# EAGLE board ambe_v1 (EAGLE 6.2)
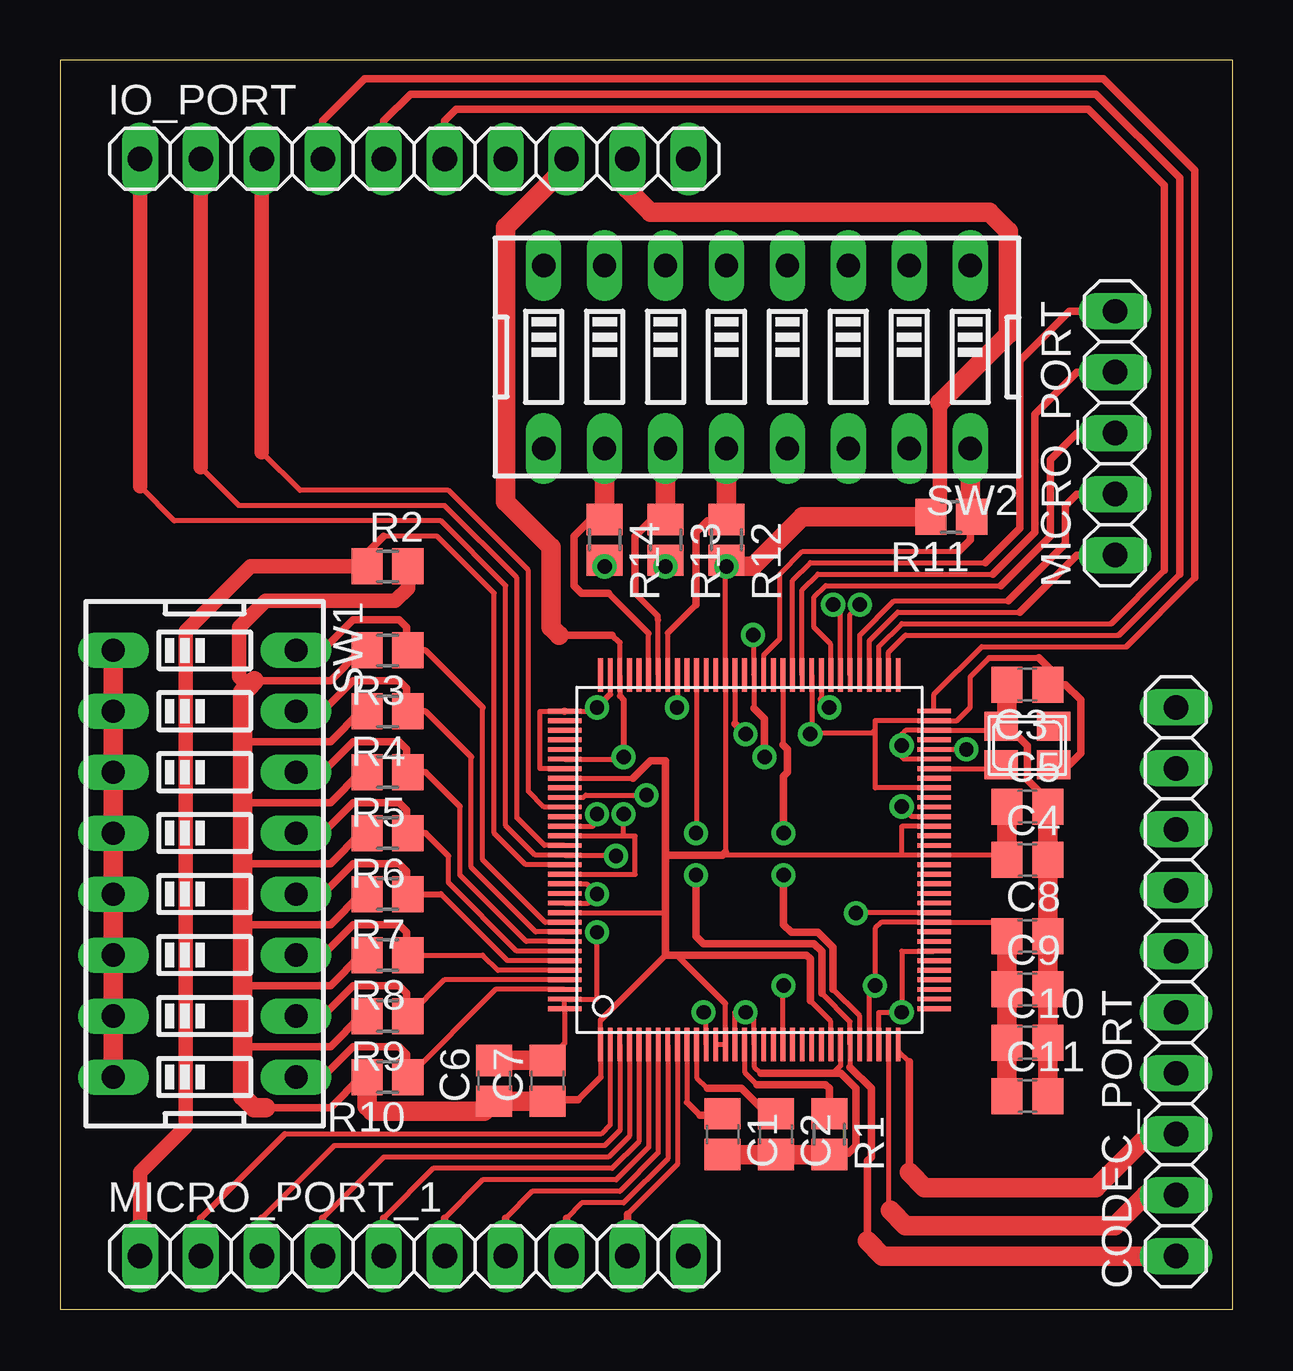
[diagram p0: board, top side]
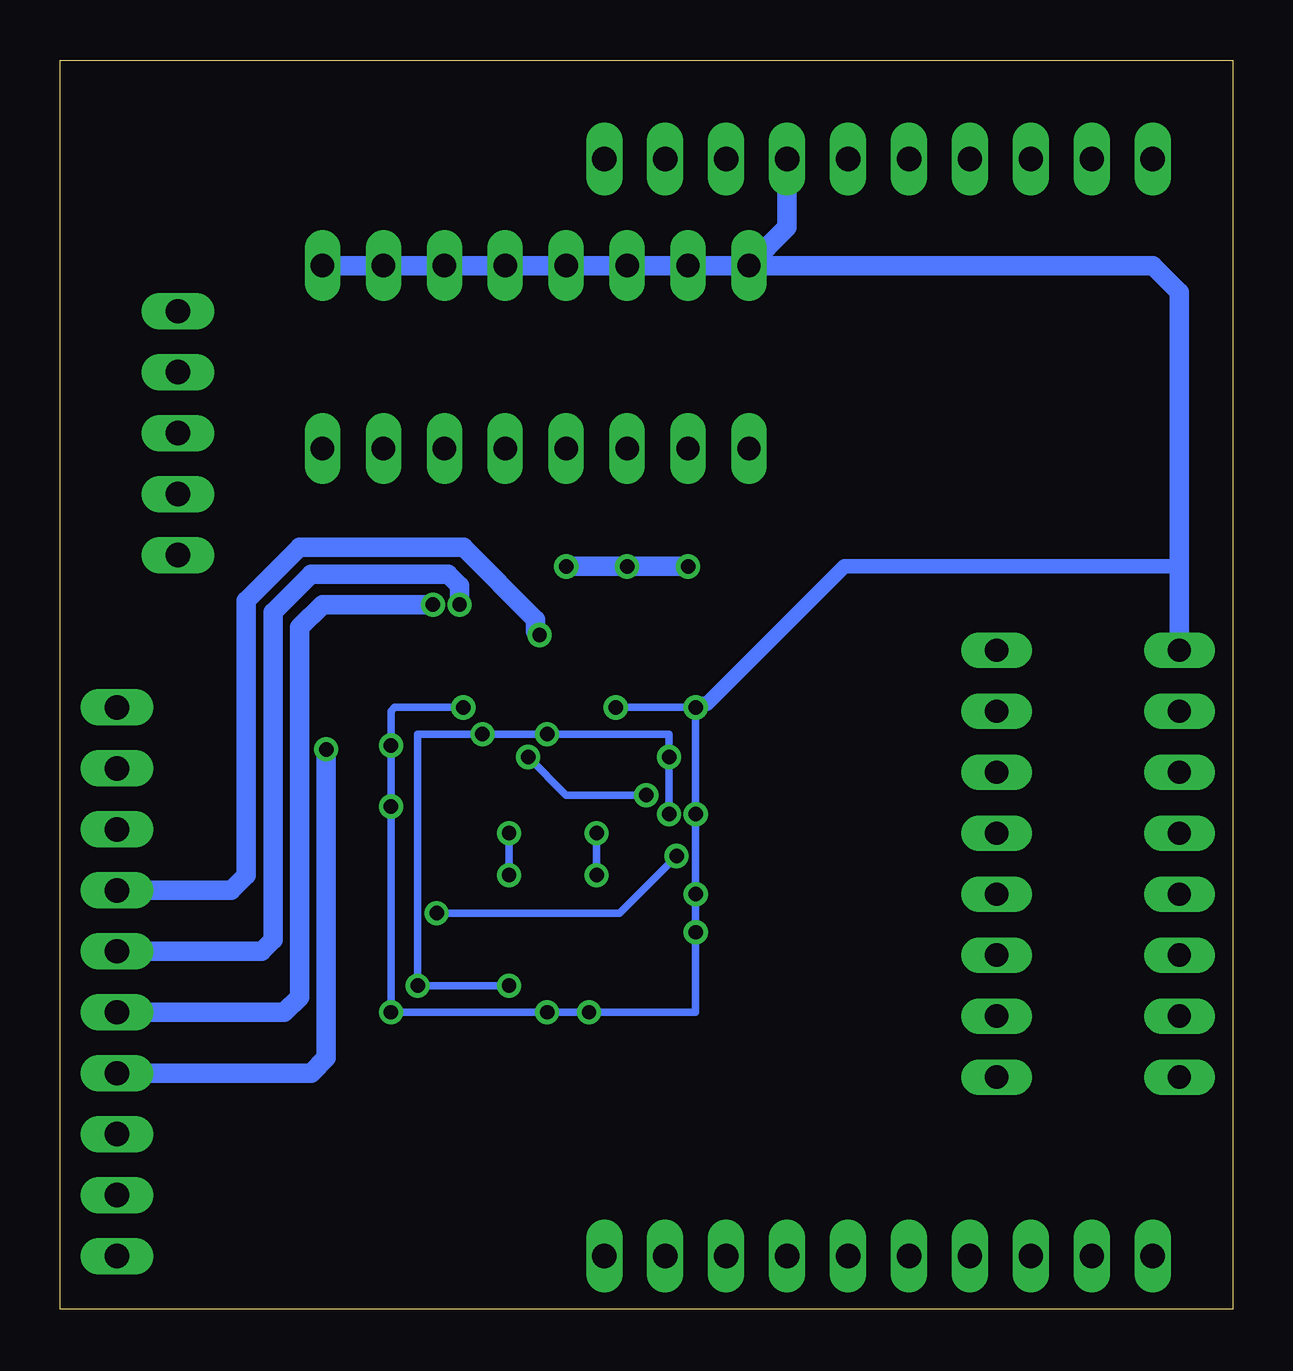
[diagram p1: board, bottom side, seen from below]

Size 48.88 x 52.06 mm. Coordinates in mm from the lower left corner, seen from the top.
Outline: 0,0 48.88,0 48.88,52.06 0,52.06 0,0
Copper layers (1*16): Top 0.035mm / dielectric 1.5mm / Bottom 0.035mm
Design rules: minimum track width 10mil, minimum drill 24mil, track to track 11mil, track to pad 11mil, pad to pad 11mil, via to via 11mil, smd to smd 11mil, copper to edge 40mil, drill to drill 8mil, minimum pad ring 10mil, minimum via ring 8mil, stop-mask expansion 4mil, vias tented up to drill 0mil, thermal gap 10mil

## Footprints (pad centres in the part's own frame; a part is rotated, then mirrored left to right if it is on the bottom)
C0805 = smd 1.3 x 1.5: 1 -0.85,0; 2 0.85,0
1X10 = drill 1.016 long: 1 -11.43,0; 2 -8.89,0; 3 -6.35,0; 4 -3.81,0; 5 -1.27,0; 6 1.27,0; 7 3.81,0; 8 6.35,0; 9 8.89,0; 10 11.43,0
LQFP-128 = smd 0.2 x 1.4: 1 -6.2,-7.7; 2 -5.8,-7.7; 3 -5.4,-7.7; 4 -5,-7.7; 5 -4.6,-7.7; 6 -4.2,-7.7; 7 -3.8,-7.7; 8 -3.4,-7.7; 9 -3,-7.7; 10 -2.6,-7.7; 11 -2.2,-7.7; 12 -1.8,-7.7; 13 -1.4,-7.7; 14 -1,-7.7; 15 -0.6,-7.7; 16 -0.2,-7.7; 17 0.2,-7.7; 18 0.6,-7.7; 19 1,-7.7; 20 1.4,-7.7; 21 1.8,-7.7; 22 2.2,-7.7; 23 2.6,-7.7; 24 3,-7.7; 25 3.4,-7.7; 26 3.8,-7.7; 27 4.2,-7.7; 28 4.6,-7.7; 29 5,-7.7; 30 5.4,-7.7; 31 5.8,-7.7; 32 6.2,-7.7; 65 6.2,7.7; 66 5.8,7.7; 67 5.4,7.7; 68 5,7.7; 69 4.6,7.7; 70 4.2,7.7; 71 3.8,7.7; 72 3.4,7.7; 73 3,7.7; 74 2.6,7.7; 75 2.2,7.7; 76 1.8,7.7; 77 1.4,7.7; 78 1,7.7; 79 0.6,7.7; 80 0.2,7.7; 81 -0.2,7.7; 82 -0.6,7.7; 83 -1,7.7; 84 -1.4,7.7; 85 -1.8,7.7; 86 -2.2,7.7; 87 -2.6,7.7; 88 -3,7.7; 89 -3.4,7.7; 90 -3.8,7.7; 91 -4.2,7.7; 92 -4.6,7.7; 93 -5,7.7; 94 -5.4,7.7; 95 -5.8,7.7; 96 -6.2,7.7 | smd 1.4 x 0.2: 33 7.7,-6.2; 34 7.7,-5.8; 35 7.7,-5.4; 36 7.7,-5; 37 7.7,-4.6; 38 7.7,-4.2; 39 7.7,-3.8; 40 7.7,-3.4; 41 7.7,-3; 42 7.7,-2.6; 43 7.7,-2.2; 44 7.7,-1.8; 45 7.7,-1.4; 46 7.7,-1; 47 7.7,-0.6; 48 7.7,-0.2; 49 7.7,0.2; 50 7.7,0.6; 51 7.7,1; 52 7.7,1.4; 53 7.7,1.8; 54 7.7,2.2; 55 7.7,2.6; 56 7.7,3; 57 7.7,3.4; 58 7.7,3.8; 59 7.7,4.2; 60 7.7,4.6; 61 7.7,5; 62 7.7,5.4; 63 7.7,5.8; 64 7.7,6.2; 97 -7.7,6.2; 98 -7.7,5.8; 99 -7.7,5.4; 100 -7.7,5; 101 -7.7,4.6; 102 -7.7,4.2; 103 -7.7,3.8; 104 -7.7,3.4; 105 -7.7,3; 106 -7.7,2.6; 107 -7.7,2.2; 108 -7.7,1.8; 109 -7.7,1.4; 110 -7.7,1; 111 -7.7,0.6; 112 -7.7,0.2; 113 -7.7,-0.2; 114 -7.7,-0.6; 115 -7.7,-1; 116 -7.7,-1.4; 117 -7.7,-1.8; 118 -7.7,-2.2; 119 -7.7,-2.6; 120 -7.7,-3; 121 -7.7,-3.4; 122 -7.7,-3.8; 123 -7.7,-4.2; 124 -7.7,-4.6; 125 -7.7,-5; 126 -7.7,-5.4; 127 -7.7,-5.8; 128 -7.7,-6.2
1X05 = drill 1.016 long: 1 -5.08,0; 2 -2.54,0; 3 0,0; 4 2.54,0; 5 5.08,0
NX3225 = smd 1.4 x 1.2: 1 -1.1,-0.8; 2 1.1,-0.8; 3 1.1,0.8; 4 -1.1,0.8
R0805 = smd 1.3 x 1.5: 1 -0.85,0; 2 0.85,0
DIPSWITCH-08 = drill 0.97 long: 1 -8.89,-3.81; 2 -6.35,-3.81; 3 -3.81,-3.81; 4 -1.27,-3.81; 5 1.27,-3.81; 6 3.81,-3.81; 7 6.35,-3.81; 8 8.89,-3.81; 9 8.89,3.81; 10 6.35,3.81; 11 3.81,3.81; 12 1.27,3.81; 13 -1.27,3.81; 14 -3.81,3.81; 15 -6.35,3.81; 16 -8.89,3.81

## Placement (x,y rotation side)
C1  C10uF 16V  [C0805]  27.62,7.3 270 top
C2  C10uF 16V  [C0805]  29.84,7.3 270 top
C3  C1uF 10V  [C0805]  40.32,26.04 180 top
C4  C0.1uF 10V  [C0805]  40.32,18.73 0 top
C5  C0.1uF 10V  [C0805]  40.32,20.95 0 top
C6  C0.1uF 10V  [C0805]  18.1,9.53 90 top
C7  C0.1uF 10V  [C0805]  20.32,9.53 90 top
C8  C0.1uF 10V  [C0805]  40.32,15.56 0 top
C9  C0.1uF 10V  [C0805]  40.32,13.34 0 top
C10  C0.1uF 10V  [C0805]  40.32,11.11 0 top
C11  C0.1uF 10V  [C0805]  40.32,8.89 0 top
CODEC_PORT  [1X10]  46.51,13.65 90 top
IC3  AMBE-3000LQFP-128  [LQFP-128]  28.73,18.73 0 top
IO_PORT  [1X10]  14.76,47.94 0 top
MICRO_PORT  [1X05]  43.97,36.51 90 top
MICRO_PORT_1  [1X10]  14.76,2.22 0 top
Q1  [NX3225]  40.32,23.5 180 top
R1  R24.9K  [R0805]  32.07,7.3 270 top
R2  R10K  [R0805]  13.65,30.96 0 top
R3  R10K  [R0805]  13.65,27.46 180 top
R4  R10K  [R0805]  13.65,24.92 180 top
R5  R10K  [R0805]  13.65,22.38 180 top
R6  R10K  [R0805]  13.65,19.84 180 top
R7  R10K  [R0805]  13.65,17.3 180 top
R8  R10K  [R0805]  13.65,14.76 180 top
R9  R10K  [R0805]  13.65,12.22 180 top
R10  R10K  [R0805]  13.65,9.68 180 top
R11  R10K  [R0805]  37.15,33.02 180 top
R12  R10K  [R0805]  27.78,32.07 270 top
R13  R10K  [R0805]  25.24,32.07 270 top
R14  R10K  [R0805]  22.7,32.07 270 top
SW1  [DIPSWITCH-08]  6.03,18.57 270 top
SW2  [DIPSWITCH-08]  29.05,39.69 180 top

## Library data of the parts
C1-C11 R1-R14 = resistor
CODEC_PORT IO_PORT MICRO_PORT MICRO_PORT_1 = pinhead
IC3 = AMBE-3000
Q1 = adafruit
SW1 SW2 = SparkFun-Electromechanical

## Nets
1V8: C3.1 C8.1 C9.1 C10.1 C11.1 IC3.20 IC3.29 IC3.42 IC3.56 IC3.63 IC3.74 IC3.82 IC3.94 IC3.102 IC3.110 IC3.114 IO_PORT.8 Q1.4
3V3: C4.1 C5.1 C6.1 C7.1 IC3.1 IC3.13 IC3.14 IC3.25 IC3.49 IC3.52 IC3.83 IC3.104 IC3.118 IO_PORT.9 R2.2 R3.2 R4.2 R5.2 R6.2 R7.2 R8.2 R9.2 R10.2 R11.2 R12.2 R13.2 R14.2
ADCRESEXT: IC3.16 R1.1
CODEC_CLKN: CODEC_PORT.1 IC3.27 IC3.86
CODEC_FSN: CODEC_PORT.7 IC3.80 IC3.106
CODEC_RESETN: CODEC_PORT.4 IC3.60
CODEC_RX_DATA: CODEC_PORT.2 IC3.31
CODEC_TX_DATA: CODEC_PORT.3 IC3.32
CONFIG0: IC3.119 R3.1 SW1.16
CONFIG1: IC3.120 R4.1 SW1.15
CONFIG2: IC3.121 R5.1 SW1.14
CONFIG3: IC3.122 R6.1 SW1.13
CONFIG4: IC3.123 R7.1 SW1.12
CONFIG5: IC3.124 R8.1 SW1.11
CONFIG6: IC3.125 R9.1 SW1.10
CONFIG7: IC3.126 R10.1 SW1.9
CONFIG8: IC3.2 MICRO_PORT_1.2
CONFIG9: IC3.3 MICRO_PORT_1.3
CONFIG10: IC3.4 MICRO_PORT_1.4
CONFIG11: IC3.5 MICRO_PORT_1.5
CONFIG12: IC3.6 MICRO_PORT_1.6
CONFIG13: IC3.7 MICRO_PORT_1.7
CONFIG14: IC3.8 MICRO_PORT_1.8
CONFIG15: IC3.9 MICRO_PORT_1.9
DSP_RESET: IC3.113 MICRO_PORT_1.1 R2.1
GND: C1.2 C2.2 C3.2 C4.2 C5.2 C6.2 C7.2 C8.2 C9.2 C10.2 C11.2 IC3.12 IC3.15 IC3.17 IC3.26 IC3.30 IC3.39 IC3.53 IC3.59 IC3.62 IC3.73 IC3.88 IC3.95 IC3.97 IC3.103 IC3.109 IC3.115 IC3.117 IC3.127 IC3.128 IO_PORT.7 Q1.2 R1.2 SW1.1 SW1.2 SW1.3 SW1.4 SW1.5 SW1.6 SW1.7 SW1.8 SW2.1 SW2.2 SW2.3 SW2.4 SW2.5 SW2.6 SW2.7 SW2.8
HOST_CLK: CODEC_PORT.6 IC3.71
HOST_DATA: CODEC_PORT.5 IC3.70
RXRDY: IC3.75 MICRO_PORT.4
RXRQST: IC3.72 MICRO_PORT.3
SPISTE: IC3.28 IC3.77
STAT0: IC3.78
STAT1: IC3.65
STAT2/UART0_RTS: IC3.64 IO_PORT.4
STAT3: IC3.61
STAT4: IC3.55
STAT5: IC3.54
STAT6: IC3.45
STAT7: IC3.44
STAT/CONFIG0: IC3.101
STAT/CONFIG1: IC3.91 R14.1 SW2.10
STAT/CONFIG2: IC3.90 R13.1 SW2.11
STAT/CONFIG3: IC3.89 R12.1 SW2.12
STAT/CONFIG4: IC3.85
STAT/CONFIG5: IC3.84
STAT/CONFIG6: IC3.81
STAT/CONFIG7: IC3.79 R11.1 SW2.16
TXFRM: IC3.76 MICRO_PORT.5
TXRDY: IC3.69 MICRO_PORT.2
TXRQST: IC3.68 MICRO_PORT.1
UART0_CHAN_RX: IC3.43 IC3.112 IO_PORT.1
UART0_CHAN_TX: IC3.111 IO_PORT.2
UART0_CTS: IC3.107 IO_PORT.3
UART1_RX: IC3.67 IO_PORT.6
UART1_TX: IC3.66 IO_PORT.5
VREF_1V: C1.1 IC3.10
VREF_2V: C2.1 IC3.11
X1: IC3.58 Q1.3

## Tracks (layer width: path | path; a pad name or v marks a point on that pad's centre or on a via)
1V8  (via drill 0.6)
  Top 0.203: IC3.102 23.41,22.93 | IC3.110 23.5,19.73 | IC3.114 23.97,18.13 23.97,19.73 23.5,19.73 | 23.5,19.73 v23.5,20.64 | IC3.56 33.97,21.73 33.97,24.13 | 33.97,24.13 33.97,24.53 IC3.63 37.39,24.53 37.94,25.08 37.94,26.35 38.73,27.15 | 23.33,25.56 IC3.94 23.33,27.78 | IC3.74 31.33,24.03 33.87,24.03 33.97,24.13 | IC3.29 33.73,13.26 v33.97,13.49 33.97,15.88 34.23,16.13 IC3.42 38.9,16.13 | IC3.20 30.13,13.46 v30.16,13.49 | IC3.82 28.13,24.41
  Top 0.254: 23.33,25.56 23.5,25.4 v23.5,23.02 | 38.73,27.15 40.8,27.15 | 23.33,27.78 23.02,28.1
  Top 0.305: 23.41,22.93 v23.5,23.02 | 31.33,24.03 v31.27,23.97 | 28.13,24.41 v28.57,23.97 | 38.9,16.13 C8.1 | 40.8,27.15 41.27,26.67 41.27,26.14 C3.1 41.91,26.04 42.55,25.4 42.55,23.18 42.06,22.7 Q1.4 | 23.02,28.1 20.8,28.1
  Top 0.813: C8.1 C9.1 C10.1 C11.1 | IO_PORT.8 21.11,47.62 18.57,45.09 18.57,33.66 20.48,31.75 20.48,28.42 20.8,28.1
  Bottom 0.305: v23.5,20.64 v23.5,23.02 23.5,23.97 v28.57,23.97 v31.27,23.97 33.97,23.97 v33.97,13.49 v30.16,13.49
3V3  (via drill 0.6)
  Top 0.203: IC3.13 IC3.14 27.73,12.75 | 22.53,12.06 IC3.1 22.53,9.68 | IC3.104 23.88,22.13 | IC3.49 35.08,18.93 35.08,20.13 IC3.52 | IC3.49 27.62,18.93 | IC3.118 25.22,16.53 | 27.73,19.04 IC3.83 27.73,31.17 | IC3.25 32.13,12 31.27,12.86 | 39.27,18.93 IC3.49
  Top 0.254: 22.53,12.06 25.24,14.76 | 22.53,9.68 21.59,8.73 | 27.73,12.75 25.72,14.76
  Top 0.305: R3.2 12.54,27.46 11.27,26.19 8.57,26.19 8.1,26.19 | R4.2 12.54,24.92 11.27,23.65 7.62,23.65 | R5.2 12.54,22.38 11.27,21.11 7.78,21.11 7.62,20.95 | R6.2 12.54,19.84 11.27,18.57 7.62,18.57 | R7.2 12.54,17.3 11.27,16.03 7.62,16.03 | R8.2 12.54,14.76 11.27,13.49 7.78,13.49 7.62,13.34 | R9.2 12.54,12.22 11.27,10.95 7.62,10.95 | R10.2 12.54,9.68 11.27,8.41 8.57,8.41 | 21.59,8.73 20.38,8.73 C7.1 | 25.24,18.93 25.24,22.86 24.61,22.86 23.88,22.13 | 25.24,18.93 25.24,16.51 | 25.24,16.51 25.24,14.76 25.72,14.76 31.11,14.76 31.27,14.61 31.27,12.86 | 25.24,18.93 27.62,18.93 27.73,19.04 | 25.22,16.53 25.24,16.51 | 39.27,18.93 C4.1 | 27.73,31.17 R12.2
  Top 0.61: 36.67,37.78 36.67,33.39 R11.2 | v22.7,30.96 R14.2 | v25.24,30.96 R13.2 | v27.78,30.96 R12.2 | R2.2 14.5,30.06 13.97,29.53 8.57,29.53 7.46,28.42 7.46,26.35 7.86,25.96
  Top 0.813: 8.1,26.19 7.86,25.96 7.62,25.72 7.62,23.65 7.62,20.95 7.62,18.57 7.62,16.03 7.62,13.34 7.62,10.95 7.62,8.89 8.1,8.41 8.57,8.41 | C7.1 C6.1 17.68,8.26 13.02,8.26 12.8,8.47 R10.2 | C5.1 C4.1 | R11.2 30.96,33.02 28.89,30.96 v27.78,30.96 | IO_PORT.9 23.65,46.67 24.61,45.72 38.73,45.72 39.53,44.93 39.53,40.64 36.67,37.78
  Bottom 0.813: v22.7,30.96 v25.24,30.96 v27.78,30.96
ADCRESEXT
  Top 0.203: IC3.16 28.53,9.88 29.05,9.37
  Top 0.305: 29.05,9.37 31.91,9.37 32.07,9.21 R1.1
CODEC_CLKN  (via drill 0.6)
  Top 0.203: IC3.86 26.53,19.87 | 31.75,13.18 32.93,11.99 IC3.27 32.93,10.09
  Top 0.305: 26.53,19.87 v26.51,19.84 | v26.51,18.1 26.51,15.56 26.83,15.24 31.43,15.24 31.75,14.92 31.75,13.18 | 32.93,10.09 33.81,9.21 33.81,6.35 33.66,6.19 33.66,2.86
  Top 0.813: CODEC_PORT.1 34.29,2.22 33.66,2.86
  Bottom 0.305: v26.51,19.84 v26.51,18.1
CODEC_FSN  (via drill 0.6)
  Top 0.203: 28.93,25.04 IC3.80 28.93,28.06 | IC3.106 21.81,21.33 21.91,21.43 v24.45,21.43
  Top 0.305: 28.93,25.04 29.37,24.61 v29.37,23.02 | 28.93,28.06 v28.89,28.1
  Bottom 0.305: v24.45,21.43 27.78,21.43 v29.37,23.02
  Bottom 0.813: CODEC_PORT.7 41.75,17.46 41.12,18.1 41.12,29.53 38.89,31.75 32.07,31.75 29.05,28.73 29.05,28.26 v28.89,28.1
CODEC_RESETN  (via drill 0.6)
  Top 0.203: IC3.60 v37.78,23.33
  Top 0.254: v37.78,23.33 v37.78,23.34
  Bottom 0.813: v37.78,23.34 37.78,10.48 38.42,9.84 CODEC_PORT.4
CODEC_RX_DATA
  Top 0.203: IC3.31 34.53,4.2
  Top 0.305: 34.53,4.2 34.61,4.13
  Top 0.813: CODEC_PORT.2 45.24,4.76 43.97,3.49 35.24,3.49 34.61,4.13
CODEC_TX_DATA
  Top 0.203: IC3.32 34.93,10.79 35.4,10.32
  Top 0.305: 35.4,10.32 35.4,5.71
  Top 0.813: CODEC_PORT.3 45.4,7.3 43.18,5.08 36.04,5.08 35.4,5.71
CONFIG0
  Top 0.203: IC3.119 20.22,16.13 17.62,18.73 17.62,25.08
  Top 0.254: 17.62,25.08 15.24,27.46 R3.1
  Top 0.305: R3.1 14.45,27.52 14.45,28.42 14.13,28.73 12.22,28.73 10.95,27.46 SW1.16
CONFIG1
  Top 0.203: IC3.120 19.83,15.73 17.14,18.41 17.14,23.02
  Top 0.254: 17.14,23.02 15.24,24.92 R4.1
  Top 0.305: R4.1 14.45,24.98 14.45,25.88 14.13,26.19 12.22,26.19 10.95,24.92 SW1.15
CONFIG2
  Top 0.203: IC3.121 19.43,15.33 16.67,18.1 16.67,20.95
  Top 0.254: 16.67,20.95 15.24,22.38 R5.1
  Top 0.305: SW1.14 10.95,22.38 12.22,23.65 14.13,23.65 14.45,23.34 14.45,22.44 R5.1
CONFIG3
  Top 0.203: IC3.122 19.04,14.93 16.19,17.78 16.19,18.89
  Top 0.254: 16.19,18.89 15.24,19.84 R6.1
  Top 0.305: SW1.13 10.95,19.84 12.22,21.11 14.13,21.11 14.45,20.8 14.45,19.9 R6.1
CONFIG4
  Top 0.203: IC3.123 18.65,14.53 15.88,17.3
  Top 0.254: R7.1 15.88,17.3
  Top 0.305: SW1.12 10.95,17.3 12.22,18.57 14.13,18.57 14.45,18.26 14.45,17.36 R7.1
CONFIG5
  Top 0.203: IC3.124 18.25,14.13 17.62,14.76 R8.1
  Top 0.305: SW1.11 10.95,14.76 12.22,16.03 14.13,16.03 14.45,15.72 14.45,14.82 R8.1
CONFIG6
  Top 0.203: IC3.125 16.01,13.73 R9.1
  Top 0.305: SW1.10 10.95,12.22 12.22,13.49 14.13,13.49 14.45,13.18 14.45,12.28 R9.1
CONFIG7
  Top 0.203: IC3.126 18.15,13.33 R10.1
  Top 0.305: SW1.9 10.95,9.68 12.22,10.95 14.13,10.95 14.45,10.64 14.45,9.74 R10.1
CONFIG8
  Top 0.203: IC3.2 22.93,7.69 22.54,7.3 9.37,7.3
  Top 0.254: 9.37,7.3 5.87,3.81
  Top 0.305: 5.87,3.81 MICRO_PORT_1.2
CONFIG9
  Top 0.203: IC3.3 23.33,7.46 22.7,6.83 11.43,6.83 8.41,3.81
  Top 0.305: 8.41,3.81 MICRO_PORT_1.3
CONFIG10
  Top 0.203: IC3.4 23.73,7.22 22.86,6.35 13.49,6.35 10.95,3.81
  Top 0.305: 10.95,3.81 MICRO_PORT_1.4
CONFIG11
  Top 0.203: IC3.5 24.13,6.99 23.02,5.87 15.56,5.87 13.49,3.81
  Top 0.305: 13.49,3.81 MICRO_PORT_1.5
CONFIG12
  Top 0.203: IC3.6 24.53,6.75 23.18,5.4 17.62,5.4 16.03,3.81
  Top 0.305: 16.03,3.81 MICRO_PORT_1.6
CONFIG13
  Top 0.203: IC3.7 24.93,6.52 23.34,4.92 19.68,4.92 18.57,3.81
  Top 0.305: 18.57,3.81 MICRO_PORT_1.7
CONFIG14
  Top 0.203: IC3.8 25.33,6.28 23.5,4.45 21.75,4.45 21.11,3.81
  Top 0.305: 21.11,3.81 MICRO_PORT_1.8
CONFIG15
  Top 0.203: IC3.9 25.73,6.05 23.65,3.97
  Top 0.305: 23.65,3.97 MICRO_PORT_1.9
DSP_RESET
  Top 0.203: IC3.113 19.41,18.53 18.1,19.84 18.1,29.84 15.72,32.23 13.49,32.23
  Top 0.305: 13.49,32.23 12.86,31.59 12.86,31.01 R2.1
  Top 0.61: MICRO_PORT_1.1 3.33,5.71 5.24,7.62 5.24,28.26 7.94,30.96 R2.1
GND  (via drill 0.6)
  Top 0.203: IC3.15 28.13,12.38 v28.57,12.38 28.93,12.38 IC3.17 28.93,10.12 29.21,9.84 | IC3.30 34.13,12.38 v35.08,12.38 35.08,14.93 IC3.39 | 21.04,24.92 IC3.97 22.23,24.93 | IC3.103 20,22.53 20,24.92 IC3.97 | IC3.117 22.01,16.93 v22.38,17.3 21.95,17.73 IC3.115 | IC3.109 22.2,20.13 22.38,20.32 v22.38,20.64 | IC3.95 22.93,25.63 | IC3.88 25.73,25.1 | IC3.73 31.73,25.42 | IC3.53 35.51,20.53 v35.08,20.95 | IC3.59 35.17,22.93 35.08,23.02 v35.08,23.5 35.08,23.97 35.24,24.13 IC3.62 39.06,24.13 | IC3.12 26.93,12.28 v26.83,12.38 | v22.38,15.72 22.38,12.93 IC3.127 IC3.128 21.03,11.09 C7.2 | IC3.26 32.53,10.15 32.23,9.84
  Top 0.254: 22.23,24.93 v22.38,25.08 22.93,25.63
  Top 0.305: IC3.97 | 25.73,25.1 v25.72,25.08 | 31.73,25.42 v32.07,25.08 | 29.21,9.84 32.23,9.84 32.54,9.84 33.18,9.21 33.18,6.83 32.86,6.51 32.12,6.51 R1.2 | C5.2 40.8,21.33 40.8,21.59 40.32,22.07 40.32,23.5 39.52,24.3 Q1.2 39.06,24.13
  Top 0.813: SW1.1 SW1.2 SW1.3 SW1.4 SW1.5 SW1.6 SW1.7 SW1.8 | C6.2 C7.2 | C1.2 C2.2 R1.2 | C3.2 39.47,24.55 Q1.2 | C11.2 C10.2 C9.2 C8.2 C4.2 C5.2
  Bottom 0.305: v25.72,25.08 v22.38,25.08 | v22.38,25.08 v22.38,20.64 v22.38,17.3 v22.38,15.72 22.38,12.38 v26.83,12.38 v28.57,12.38 v35.08,12.38 v35.08,20.95 v35.08,23.5 35.08,24.92 34.92,25.08 v32.07,25.08 | v22.38,25.08 22.07,25.08
  Bottom 0.61: 2.22,30.96 16.19,30.96 21.91,25.24 22.23,25.24 v22.38,25.08 | 25.73,25.08 v25.72,25.08
  Bottom 0.813: SW2.1 SW2.2 SW2.3 SW2.4 SW2.5 SW2.6 SW2.7 SW2.8 | IO_PORT.7 18.57,45.09 SW2.8 | SW2.8 3.33,43.5 2.22,42.39 2.22,30.96 SW1.1
HOST_CLK  (via drill 0.6)
  Top 0.203: IC3.71 32.53,29.06 v32.23,29.37
  Bottom 0.813: CODEC_PORT.6 40.48,14.92 40.01,15.4 40.01,29.05 38.42,30.64 32.7,30.64 32.23,30.16 v32.23,29.37
HOST_DATA  (via drill 0.6)
  Top 0.203: IC3.70 32.93,28.96 v33.34,29.37
  Bottom 0.813: CODEC_PORT.5 39.53,12.38 38.89,13.02 38.89,28.42 37.94,29.37 v33.34,29.37
RXRDY
  Top 0.203: IC3.75 30.93,29.98 31.59,30.64 38.89,30.64
  Top 0.305: 38.89,30.64 40.64,32.38 40.64,37.31 42.39,39.05 MICRO_PORT.4
RXRQST
  Top 0.203: IC3.72 32.13,27.71 31.43,28.42 31.43,29.69 31.91,30.16 39.21,30.16
  Top 0.305: 39.21,30.16 41.27,32.23 41.27,35.4 42.39,36.51 MICRO_PORT.3
SPISTE  (via drill 0.6)
  Top 0.203: IC3.28 33.33,12.23 32.23,13.34 | IC3.77 30.13,23.52
  Top 0.305: 32.23,13.34 32.23,15.08 31.59,15.72 30.48,15.72 30.16,16.03 v30.16,18.1 | 30.13,23.52 30.32,23.34 30.32,22.38 30.16,22.23 v30.16,19.84
  Bottom 0.305: v30.16,19.84 v30.16,18.1
STAT2/UART0_RTS
  Top 0.203: IC3.64 36.43,25.64 38.42,27.62 44.45,27.62
  Top 0.254: 44.45,27.62 47.31,30.48
  Top 0.305: 47.31,30.48 47.31,47.47 43.5,51.28 12.7,51.28 10.95,49.53 IO_PORT.4
STAT/CONFIG1
  Top 0.203: IC3.91 24.53,28.17
  Top 0.254: 24.53,28.17 22.86,29.84
  Top 0.305: 22.86,29.84 21.75,29.84 21.43,30.16 21.43,32.23 22.07,32.86 22.64,32.86 R14.1
  Top 0.813: SW2.10 R14.1
STAT/CONFIG2
  Top 0.203: IC3.90 24.93,28.72
  Top 0.254: 24.93,28.72 24.92,28.73 24.92,28.89 23.97,29.84
  Top 0.305: 23.97,29.84 23.97,32.23 24.61,32.86 25.18,32.86 R13.1
  Top 0.813: SW2.11 R13.1
STAT/CONFIG3
  Top 0.203: IC3.89 25.33,28.19
  Top 0.254: 25.33,28.19 26.51,29.37
  Top 0.305: 26.51,29.37 26.51,32.38 26.99,32.86 27.73,32.86 R12.1
  Top 0.813: SW2.12 R12.1
STAT/CONFIG7
  Top 0.203: IC3.79 29.33,27.27 30,27.94 30,30.64 30.96,31.59 37.47,31.59
  Top 0.305: 37.47,31.59 37.94,32.07 37.94,32.96 R11.1
  Top 0.813: SW2.16 37.94,33.08 R11.1
TXFRM
  Top 0.203: IC3.76 30.53,30.38 31.27,31.11 38.58,31.11
  Top 0.305: 38.58,31.11 40.01,32.54 40.01,39.53 42.07,41.59 MICRO_PORT.5
TXRDY
  Top 0.203: IC3.69 33.33,28.09 34.77,29.53 39.53,29.53
  Top 0.305: 39.53,29.53 41.91,31.91 41.91,33.5 42.39,33.97 MICRO_PORT.2
TXRQST
  Top 0.203: IC3.68 33.73,27.86 34.92,29.05 40.01,29.05
  Top 0.305: 40.01,29.05 42.39,31.43 MICRO_PORT.1
UART0_CHAN_RX  (via drill 0.6)
  Top 0.203: 23.14,18.93 IC3.112 19.8,18.93 18.57,20.16 18.57,30.16 15.88,32.86 4.76,32.86 3.33,34.29 | IC3.43 33.2,16.53 v33.18,16.51
  Top 0.305: 23.14,18.93 v23.18,18.89
  Top 0.61: IO_PORT.1 3.33,34.29
  Bottom 0.305: v33.18,16.51 25.56,16.51 v23.18,18.89
UART0_CHAN_TX
  Top 0.203: IC3.111 20.2,19.33 19.05,20.48 19.05,30.48 16.03,33.5 7.46,33.5 5.87,35.08
  Top 0.61: IO_PORT.2 5.87,35.08
UART0_CTS
  Top 0.203: IC3.107 20.18,20.93 19.53,21.59 19.53,30.8 16.19,34.13 10,34.13 8.41,35.72
  Top 0.61: IO_PORT.3 8.41,35.72
UART1_RX
  Top 0.203: IC3.67 34.13,27.62 35.08,28.57 43.81,28.57
  Top 0.254: 43.81,28.57 46.04,30.8
  Top 0.305: 46.04,30.8 46.04,46.83 42.86,50.01 16.51,50.01 16.03,49.53 IO_PORT.6
UART1_TX
  Top 0.203: IC3.66 34.53,27.39 35.24,28.1 44.13,28.1
  Top 0.254: 44.13,28.1 46.67,30.64
  Top 0.305: 46.67,30.64 46.67,47.15 43.18,50.64 14.61,50.64 13.49,49.53 IO_PORT.5
VREF_1V
  Top 0.203: IC3.10 26.13,8.63
  Top 0.254: 26.13,8.63 26.67,8.1
  Top 0.305: 27.57,8.41 C1.1 27.57,8.1 26.67,8.1
VREF_2V
  Top 0.203: IC3.11 26.53,9.66 26.99,9.21
  Top 0.305: 26.99,9.21 28.42,9.21 29.21,8.41 29.58,8.41 C2.1
X1
  Top 0.203: IC3.58 39.06,22.53
  Top 0.305: 39.06,22.53 Q1.3